# Altium PCB CT310高端控制盒核心板电路V1.3.PcbDoc (part 4 of 10)
Units mil, origin at the board's own origin, x right, y up, seen from the top; angles counter-clockwise.
Board outline 3735.76 x 4625 mil, 2 copper layers (TOP, BOTTOM), stack 10.4 mil thick; 198 components, 362 nets, 1085 pads, 352 vias.
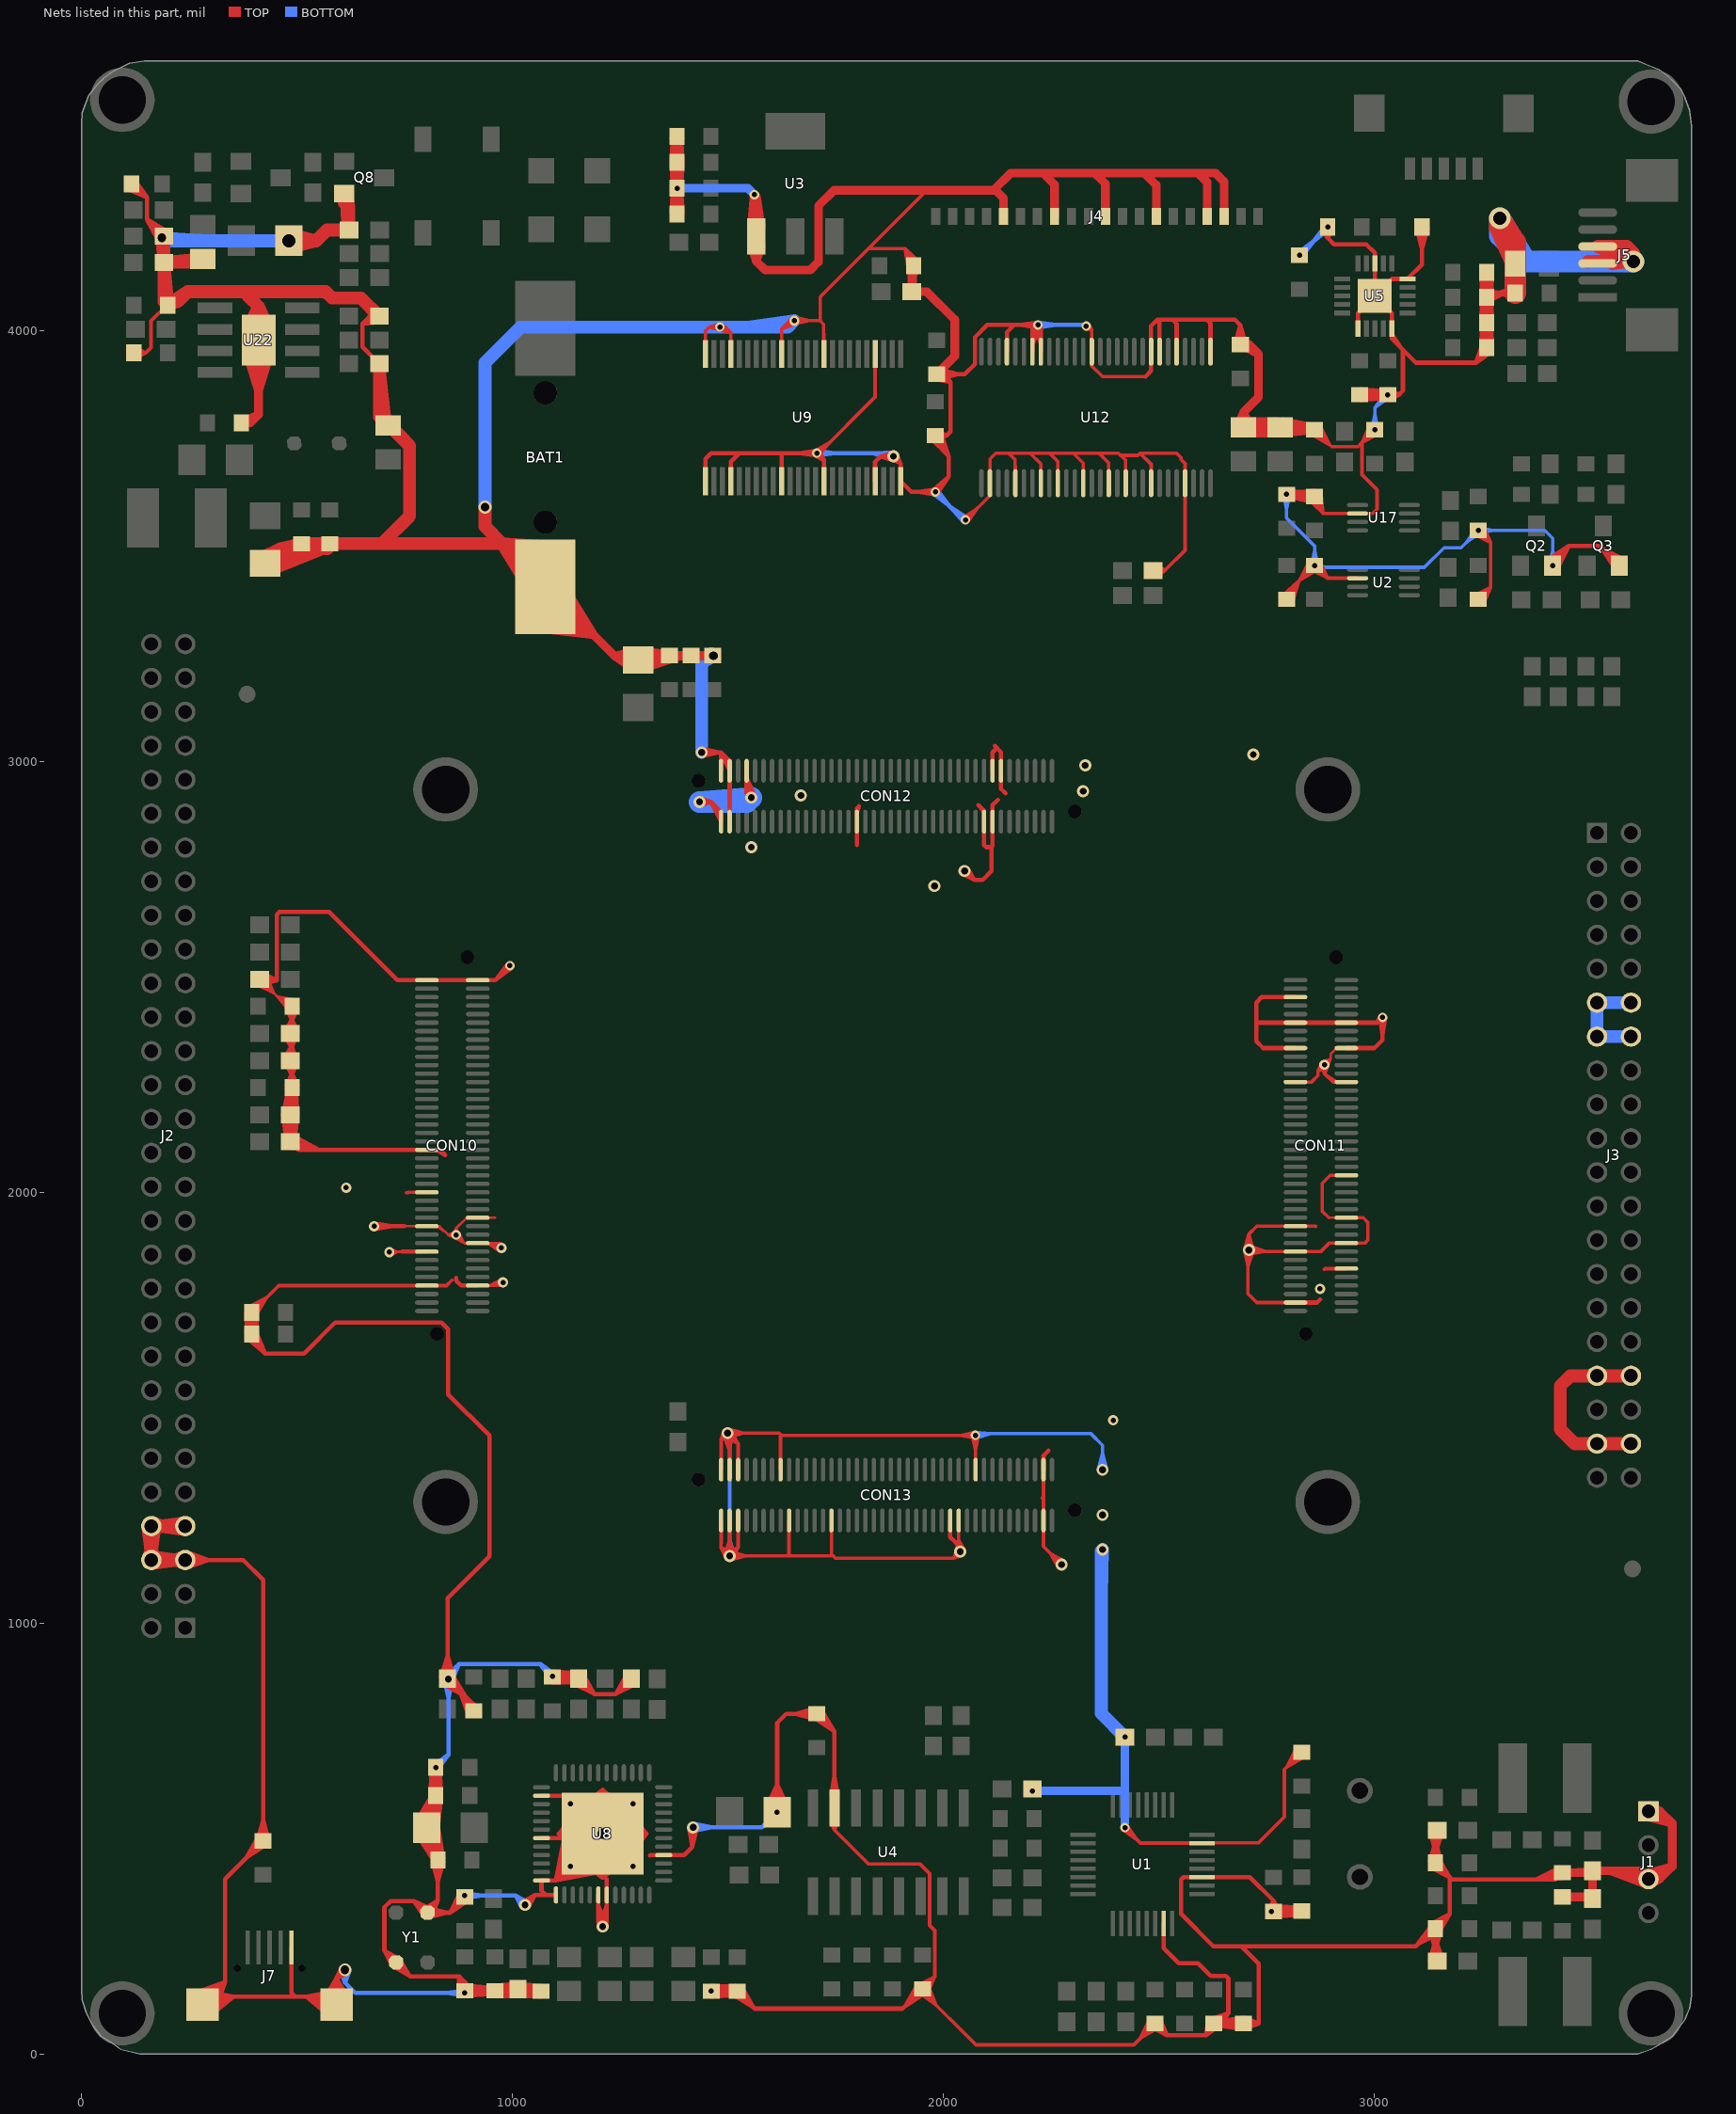
[diagram p4: the nets of this part, all layers, seen from the top]

## Via types
v1: diameter 22, hole 12, TOP to BOTTOM, tented both sides, 177 vias
v2: diameter 22, hole 12, TOP to BOTTOM, 89 vias
v3: diameter 28, hole 16, TOP to BOTTOM, 37 vias
v4: diameter 30, hole 20, TOP to BOTTOM, tented both sides, 26 vias
v5: diameter 24, hole 12, TOP to BOTTOM, 17 vias
v6: diameter 50, hole 30, TOP to BOTTOM, tented both sides, 5 vias
v7: diameter 40, hole 24, TOP to BOTTOM, 1 vias

## Nets (pads, with @x,y where several pads share a name; then routed paths per layer and width w, separated by ;. In a path a pad name is that pad's centre, name@x,y a point inside that pad or via, vN(x,y) a via of type N, cw(c..) or ccw(c..) an arc to the next point about the centre after c; other vN are vias at no path point) (continued)
GND: (continued)
  TOP w10: D3.2@108.78,4327.13 151.41,4308.97 ; D3.2@115.33,4338.03 151.41,4308.97 ; D3.2@123.69,4340 123.69,4336.69 151.41,4308.97 ; D3.2@124.59,4346.75 151.41,4308.97 ; J2.8@142.78,1225.38 150.53,1169.9 ; J2.8@142.84,1223.26 156.7,1170.84 ; J2.6@143.05,1149.35 161.39,1199.74 ; J2.8@143.05,1221.62 161.39,1171.24 ; J2.8@143.39,1220.08 166.08,1170.84 ; J2.8@143.98,1218.26 172.25,1169.9 ; J2.8@152.77,1224.92 156.7,1170.84 ; J2.6@152.8,1146.81 161.39,1199.74 ; J2.8@152.8,1224.16 161.39,1171.24 ; J2.8@152.83,1225.87 150.53,1169.9 ; J2.8@152.89,1223.43 166.08,1170.84 ; J2.8@153.09,1222.54 172.25,1169.9 ; J2.6@160.37,1137.56 216.35,1135.26 ; J2.6@160.37,1154.68 216.35,1156.98 ; J2.6@160.87,1127.5 216.35,1135.26 ; J2.6@160.87,1164.73 216.35,1156.98 ; J2.6@161.33,1137.5 215.4,1141.43 ; J2.6@161.33,1154.74 215.4,1150.81 ; J2.6@162.08,1137.52 215.01,1146.12 ; J2.6@162.08,1154.71 215.01,1146.12 ; J2.8@162.08,1216.26 215.01,1224.86 ; J2.8@162.08,1233.45 215.01,1224.86 ; J2.6@162.82,1137.61 215.4,1150.81 ; J2.6@162.82,1154.62 215.4,1141.43 ; J2.6@162.99,1127.56 215.4,1141.43 ; J2.6@162.99,1164.67 215.4,1150.81 ; J2.6@163.71,1137.81 216.35,1156.98 ; J2.6@163.71,1154.42 216.35,1135.26 ; J2.6@164.62,1127.78 215.01,1146.12 ; J2.6@164.62,1164.46 215.01,1146.12 ; J2.8@164.62,1206.52 215.01,1224.86 ; J2.8@164.62,1243.2 215.01,1224.86 ; J2.6@166.16,1128.12 215.4,1150.81 ; J2.6@166.16,1164.12 215.4,1141.43 ; J2.6@167.99,1128.7 216.35,1156.98 ; J2.6@167.99,1163.53 216.35,1135.26 ; J2.8@169.69,1222.54 150.53,1169.9 ; J2.8@169.89,1223.43 156.7,1170.84 ; J2.6@169.98,1146.81 161.39,1199.74 ; J2.8@169.98,1224.16 161.39,1171.24 ; J2.8@169.95,1225.87 172.25,1169.9 ; J2.8@170.01,1224.92 166.08,1170.84 ; R5.1@176.73,4210 151.41,4257.78 ; R5.1@177.39,4209.53 152.1,4257.37 ; R5.1@177.47,4209.41 153.21,4254.38 ; J2.8@178.8,1218.26 150.53,1169.9 ; J2.8@179.39,1220.08 156.7,1170.84 ; J2.6@179.73,1149.35 161.39,1199.74 ; J2.8@179.73,1221.62 161.39,1171.24 ; R5.1@179.85,4223.07 R5.1@197.83,4230.03 ; J2.8@179.94,1223.26 166.08,1170.84 ; J2.8@180,1225.38 172.25,1169.9 ; R5.1@188.65,4218.57 151.41,4257.78 ; R5.1@189.98,4219.22 151.41,4257.78 ; R5.1@192.81,4222.09 153.21,4254.38 ; R5.1@192.98,4221.92 152.1,4257.37 ; R5.1@194.91,4210.98 R5.1@197.83,4230.03 ; J2.7@233.53,1207.44 185.17,1235.72 ; J2.7@233.53,1242.27 185.17,1214 ; J2.7@235.36,1206.86 186.12,1229.55 ; J2.7@235.36,1242.86 186.12,1220.17 ; J2.5@236.9,1127.78 186.51,1146.12 ; J2.5@236.9,1164.46 186.51,1146.12 ; J2.7@236.9,1206.52 186.51,1224.86 ; J2.7@236.9,1243.2 186.51,1224.86 ; J2.7@237.81,1216.55 185.17,1235.72 ; J2.7@237.81,1233.16 185.17,1214 ; J2.7@238.53,1206.3 186.12,1220.17 ; J2.7@238.53,1243.41 186.12,1229.55 ; J2.7@238.7,1216.35 186.12,1229.55 ; J2.7@238.7,1233.36 186.12,1220.17 ; J2.5@239.44,1137.52 186.51,1146.12 ; J2.5@239.44,1154.71 186.51,1146.12 ; J2.7@239.44,1216.26 186.51,1224.86 ; J2.7@239.44,1233.45 186.51,1224.86 ; J2.7@240.19,1216.24 186.12,1220.17 ; J2.7@240.19,1233.48 186.12,1229.55 ; J2.7@240.65,1206.24 185.17,1214 ; J2.7@240.65,1243.47 185.17,1235.72 ; J2.5@240.82,1137.52 293.75,1146.12 ; J2.5@240.82,1154.71 293.75,1146.12 ; J2.7@241.15,1216.3 185.17,1214 ; J2.7@241.15,1233.42 185.17,1235.72 ; J2.5@243.36,1127.78 293.75,1146.12 ; J2.5@243.36,1164.46 293.75,1146.12 ; J7.7@262.93,141.83 332.39,166.6 ; J7.7@267,132.51 332.39,166.6 ; J7.7@272.25,123.92 332.39,166.6 ; J7.7@278.06,136.74 352.97,132.83 ; J7.7@278.21,126.68 352.97,132.83 ; J7.7@279.28,146.84 352.97,132.83 ; J7.7@284.27,102.72 352.97,132.83 ; J7.7@288.92,93.79 352.97,132.83 ; J7.7@289.72,106.45 332.39,166.6 ; J7.7@294.79,85.49 352.97,132.83 ; J7.7@298.31,101.2 332.39,166.6 ; J7.7@307.63,97.13 332.39,166.6 ; C112.2@384.89,1659.99 425.76,1625 ; C112.2@394.24,1668.6 425.76,1625 ; C112.2@394.24,1670.57 394.24,1656.52 425.76,1625 ; C112.2@405.36,1674.78 425.76,1625 ; C89.1@408.16,496.06 420.76,542.09 C89.1@433.36,496.06 ; C89.1@408.6,501.97 381.83,455.44 ; R174.1@413.18,2494.14 415.69,2491.63 452.39,2491.63 ; R174.1@415.15,2494.14 452.39,2491.63 ; R174.1@417.06,2479.58 452.39,2491.63 ; C89.1@418.79,494.37 381.83,455.44 ; R174.1@419,2508.31 452.39,2491.63 ; C89.1@426.91,484.58 381.83,455.44 ; R129.1@467.4,2180.03 R128.1@472.95,2129.94 ; R129.1@467.41,2180.25 C88.2@477.26,2229.15 ; R128.1@469.52,2118.74 484.05,2166.26 R128.1@498.57,2118.74 ; R129.1@469.52,2177.33 484.05,2129.81 R129.1@498.57,2177.33 ; R129.1@469.52,2181.67 484.05,2229.18 R129.1@498.57,2181.67 ; R129.1@471.54,2181.97 C88.2@487.06,2229.18 ; R129.1@472.12,2174.76 R128.1@495.15,2129.94 ; R129.1@472.32,2184.79 C88.2@497.2,2228.87 ; C88.2@475.28,2239.82 R129.1@484.05,2192.51 ; R128.1@483.52,2102.1 550.1,2098.06 ; C88.2@484.05,2238.49 R129.1@484.05,2179.5 R128.1@484.05,2116.57 502.56,2098.06 CON10.39@800.66,2098.06 831.13,2098.06 ; R128.1@486.02,2116.57 550.1,2098.06 ; 486.94,177.28 J7.5@486.94,212.2 ; J7.5@486.94,246.65 486.94,141.65 495.76,132.83 ; C88.2@487.98,2240.46 R129.1@484.05,2192.51 ; R128.1@491.62,2130.14 550.1,2098.06 ; R129.1@495.98,2174.76 R128.1@472.95,2129.94 ; R129.1@496.33,2183.05 C88.2@477.26,2229.15 ; C88.2@500.41,2237.75 R129.1@484.05,2192.51 ; R129.1@500.58,2181.36 C88.2@487.06,2229.18 ; R129.1@500.66,2178.37 C88.2@497.2,2228.87 ; R129.1@500.69,2180.03 R128.1@495.15,2129.94 ; J7.6@560.03,123.05 591.27,175.51 ; J7.6@569.25,118.56 591.27,175.51 ; J7.6@576.32,85.7 520.82,132.83 ; J7.6@578.93,115.71 591.27,175.51 ; J7.6@582.35,93.9 520.82,132.83 ; J7.6@587.13,102.76 520.82,132.83 ; J7.6@592.27,146.83 520.82,132.83 ; J7.6@593.37,126.67 520.82,132.83 ; J7.6@593.53,136.74 520.82,132.83 ; v4@602.52,200.67 591.27,175.51 ; J7.6@603.61,115.71 591.27,175.51 ; v4(610.76,195) 591.27,175.51 ; J7.6@613.29,118.56 591.27,175.51 ; v4@616.43,186.76 591.27,175.51 ; J7.6@622.51,123.05 591.27,175.51 ; v5@679.15,1927.55 720.62,1920.88 ; v5@679.25,1913.6 720.62,1920.88 ; R135.2@680.21,4044.87 651.41,4015.65 ; R135.2@690.04,4032.85 668.61,4032.85 ; R133.2@690.62,3922.85 690.14,3922.85 651.41,3961.59 651.41,4015.65 ; R135.2@692.33,4018.64 651.41,4015.65 ; Y1.4@719.83,205.43 702.16,239.38 ; Y1.4@722.1,203.1 761.54,180 ; Y1.4@736.11,221.71 702.16,239.38 ; Y1.4@738.44,219.44 761.54,180 ; 743.16,2098.06 CON10.39@778.16,2098.06 ; 743.16,2491.75 CON10.79@778.16,2491.75 ; 748.92,1920.88 678.92,1920.88 v5(678.61,1920.57) 720.62,1920.88 ; C27.2@775.54,537.43 C26.2@809.02,595.06 ; C27.2@776.1,511.07 C31.2@813.79,453.68 ; C27.2@777.1,541.09 C26.2@821.39,598.03 ; C27.2@777.96,507.36 C31.2@826.39,452.84 ; C27.2@777.94,507.4 C31.2@826.39,452.57 ; C27.2@778.17,542.97 C26.2@826.39,595.2 ; CON10.15@778.16,1861.83 743.61,1861.83 CON10.15@800.66,1861.83 ; C27.2@779.61,545.05 C26.2@833.43,593.49 ; C27.2@780.73,503.58 C31.2@837.52,458.99 ; C27.2@784.66,533.02 C26.2@809.02,595.06 ; C27.2@784.95,515.98 C31.2@813.79,453.68 ; C27.2@785.49,535.46 C26.2@821.39,598.03 ; C27.2@786.06,536.66 C26.2@826.39,595.2 ; C27.2@786.88,538.03 C26.2@833.43,593.49 ; C27.2@787.52,511.07 C31.2@837.52,458.99 ; Y1.2@793.58,319.95 770.5,354.74 ; C27.2@794.24,530.07 C26.2@809.02,595.06 ; C27.2@794.33,519.52 C31.2@813.79,453.68 ; C27.2@794.51,531.08 C26.2@821.39,598.03 ; Y1.2@794.63,336.45 826.39,356.5 ; C27.2@794.7,531.56 C26.2@826.39,595.2 ; C27.2@794.99,532.14 C26.2@833.43,593.49 ; C27.2@795.21,517.5 C31.2@837.52,458.99 ; C27.2@800.64,525 C27.2@826.39,499.25 ; Y1.2@803.75,316.12 848.97,327.68 Y1.2@803.75,339.24 ; C27.2@806.37,524.13 C31.2@837.52,458.99 ; C27.2@806.56,526.26 C26.2@833.43,593.49 ; C27.2@806.8,526.86 C26.2@826.39,595.2 ; C27.2@806.94,527.35 C26.2@821.39,598.03 ; C27.2@807.07,522 C31.2@813.79,453.68 ; C27.2@807.12,528.44 C26.2@809.02,595.06 ; Y1.2@808.54,337.52 770.5,354.74 ; C26.2@808.7,601.2 C32.2@811.97,652.37 ; C26.2@808.82,603.9 C32.2@822.58,651.56 ; C26.2@809.03,604.94 C32.2@826.39,649.97 ; C26.2@809.45,606.34 C32.2@831.96,649.34 ; Y1.2@812.29,321.69 826.39,356.5 ; C31.2@813.79,446.34 826.39,400.31 ; C32.2@815.42,665.59 814.14,622.32 ; C32.2@815.42,665.64 C26.2@813.03,615.33 ; C32.2@815.48,663.98 825.41,624.14 ; C32.2@815.49,663.88 826.39,622.44 ; C32.2@815.51,666.18 810.17,624.19 ; C32.2@815.55,663.62 C26.2@831.11,611.02 ; C32.2@815.59,663.47 829.06,624.27 ; C32.2@815.65,663.26 830.5,624.61 ; C27.2@815.69,527.81 C31.2@837.52,458.99 ; C27.2@816.11,523.19 C26.2@833.43,593.49 ; C27.2@816.61,524.79 C26.2@826.39,595.2 ; C27.2@816.88,526.03 C26.2@821.39,598.03 ; C27.2@817.09,522.25 C31.2@813.79,453.68 ; C27.2@817.14,528.9 C26.2@809.02,595.06 ; C32.2@817.97,669.93 C32.2@809.02,660.08 ; C32.2@821.39,663.03 C26.2@826.39,614.7 ; C32.2@821.71,659.01 C32.2@834.1,662.67 ; C32.2@822.29,659.07 C32.2@809.02,660.08 ; CON10.79@823.16,2491.75 858.16,2491.75 ; C32.2@823.81,670.49 C32.2@834.1,662.67 ; C27.2@825.52,530.19 C31.2@837.52,458.99 ; C27.2@826.06,521.46 C26.2@833.43,593.49 ; C31.2@826.39,448.03 826.39,400.31 ; C31.2@826.39,451.97 C27.2@826.39,499.25 ; C27.2@826.39,525 826.39,660 v1(821.39,665) ; C27.2@826.69,524.11 C26.2@826.39,595.2 ; C27.2@826.99,526.11 C26.2@821.39,598.03 ; C27.2@827.07,530.9 C26.2@809.02,595.06 ; C32.2@827.05,663 810.17,624.19 ; C27.2@827.14,521.02 C31.2@813.79,453.68 ; C32.2@827.22,663.59 814.14,622.32 ; C32.2@827.24,663.65 C26.2@813.03,615.33 ; C32.2@827.32,665.89 830.5,624.61 ; C32.2@827.38,665.28 826.39,622.44 ; C32.2@827.35,665.68 829.06,624.27 ; C32.2@827.34,665.74 C26.2@831.11,611.02 ; C32.2@827.39,665.15 825.41,624.14 ; C26.2@833.5,605.84 C32.2@811.97,652.37 ; C26.2@834.06,600.85 C32.2@831.96,649.34 ; C26.2@834.04,603.3 C32.2@822.58,651.56 ; C26.2@834.1,597.67 C27.2@826.39,549.97 ; C26.2@834.1,602.33 C32.2@826.39,649.97 ; C31.2@838.99,446.34 826.39,400.31 ; C31.2@838.99,453.68 C27.2@826.39,499.25 ; R44.1@839.96,857.17 889.51,830.11 ; R44.1@841.77,870.4 848.61,922.66 ; R44.1@841.78,870.65 849.78,918.84 ; R44.1@844.76,863.29 887.23,831.35 ; R44.1@844.87,863.2 885.15,834.26 ; R44.1@844.89,863.18 885.27,834.35 ; R44.1@844.98,863.1 887.54,833.33 ; R44.1@845.98,862.38 R44.1@834.09,875.14 ; R44.1@848.61,869.04 889.51,830.11 ; R44.1@848.61,872.97 848.61,922.66 ; R44.1@851.11,878.99 R44.1@834.09,875.14 ; R44.1@857.64,875.8 887.54,833.33 ; R44.1@857.81,875.6 887.23,831.35 ; R44.1@859.7,871.01 849.78,918.84 ; R44.1@859.69,871.13 848.61,922.66 ; R44.1@860.04,878.27 889.51,830.11 ; 861.27,2491.75 CON10.80@896.27,2491.75 ; R44.1@863.14,875.14 848.61,922.66 ; 868.61,1800.57 868.61,1794.76 880.27,1783.1 ; C37.2@883.75,370.66 857.93,329.76 ; C37.2@883.76,370.68 859.77,332.59 ; C37.2@883.8,370.72 859.74,333.32 ; C37.2@883.9,370.86 856.8,331.69 ; C37.2@884.03,363.27 C37.2@895.08,354.86 ; C36.2@884.93,145.93 C36.2@897.86,152.2 ; C37.2@885.47,362.04 C37.2@876.03,371.37 ; C36.2@886.13,135.74 C36.2@874.04,144.53 ; C36.2@886.65,146.2 875.76,180 ; C37.2@886.65,364.37 854.85,327.68 ; C36.2@887.39,147.07 929.3,152.77 ; C36.2@887.66,147.12 931.93,151.23 ; C36.2@888.5,135.2 931.74,137.35 ; C37.2@888.61,361.44 854.85,327.68 ; C36.2@888.78,135.2 930.69,139.39 ; C36.2@888.75,147.2 C36.2@874.04,144.53 ; C37.2@889.19,373.12 C37.2@876.03,371.37 ; C36.2@889.3,147.16 930.69,139.39 ; C36.2@889.56,147.13 931.74,137.35 ; C36.2@890.1,133.49 938.84,138.01 ; C36.2@890.1,158.91 938.84,154.39 ; C36.2@890.36,135.46 931.93,151.23 ; C36.2@890.66,135.56 929.3,152.77 ; C37.2@892.82,362.87 856.8,331.69 ; C37.2@892.9,362.95 859.74,333.32 ; C37.2@892.95,363 859.77,332.59 ; C37.2@893.01,363.06 857.93,329.76 ; C36.2@893.91,138.39 C36.2@897.86,152.2 ; C36.2@894.32,134.05 938.84,154.39 ; C36.2@894.32,158.36 938.84,138.01 ; C37.2@894.4,368.73 C37.2@895.08,354.86 ; C33.2@896.19,790.47 877,842.62 ; CON10.8@896.27,1783.1 880.27,1783.1 ; C33.2@905.76,796.2 905.76,813.86 R44.1@848.61,871 848.61,1057.85 945.76,1155 945.76,1435 850.29,1530.47 850.29,1681.65 835.06,1696.88 587.64,1696.88 515.76,1625 425.76,1625 ; C33.2@907.54,796.2 877,842.62 ; C33.2@917.29,804.36 877,842.62 ; CON10.8@918.77,1783.1 880.27,1783.1 ; CON10.80@941.27,2491.75 959.79,2491.75 ; C29.1@954.95,133.6 908.93,146.2 ; C29.1@954.95,158.8 908.93,146.2 ; C29.1@956.65,146.2 908.93,146.2 ; C29.1@958.15,158.68 R33.2@1006.89,161.71 ; C29.1@959.12,133.57 R33.2@1007.48,134.39 ; C29.1@961.8,158.86 R33.2@1008.28,148.02 ; C29.1@962.28,133.6 R33.2@1008.25,146.2 ; C29.1@962.28,158.8 R33.2@1008.25,146.2 ; C29.1@962.75,133.67 R33.2@1008.28,148.02 ; C29.1@965.28,158.02 R33.2@1007.48,134.39 ; C29.1@966.16,134.77 R33.2@1006.89,161.71 ; v2@989.1,2529.53 961.4,2493.36 v2@997.57,2521.06 ; v2(993.61,2525.57) 959.79,2491.75 ; R33.2@1009.46,162.6 C29.1@962.31,146.2 ; R33.2@1010.6,133.57 C29.1@962.31,146.2 ; R33.2@1012.19,146.2 1065.19,146.2 C38.2@1065.76,145.63 ; R33.2@1012.19,150.14 R33.2@1008.25,146.2 ; R33.2@1013.77,133.57 C38.2@1062.03,146.2 ; R33.2@1014.92,162.6 C38.2@1062.03,146.2 ; v3@1023.18,352.75 1051.88,368.84 ; v3(1028.61,345.57) 1051.88,368.84 ; v3@1035.79,340.14 1051.88,368.84 ; C38.2@1058.09,134.26 R33.2@1017.6,161.67 ; C38.2@1059.23,157.5 R33.2@1016.79,134.36 ; C38.2@1061.47,133.13 R33.2@1016.11,148.01 ; C38.2@1061.95,133.05 R33.2@1016.07,146.2 ; C38.2@1062.25,158.25 R33.2@1016.07,146.2 ; C38.2@1062.73,158.3 R33.2@1016.11,148.01 ; C38.2@1065.1,132.98 R33.2@1016.79,134.36 ; C38.2@1066.36,158.08 R33.2@1017.6,161.67 ; U8.43@1066.88,500.73 1198.77,500.73 v2(1133.61,435.57) ; U8.38@1066.88,599.15 U8.49@1120.03,599.15 ; U8.48@1081.88,402.3 1100.35,402.3 ; U8.43@1081.88,500.73 U8.49@1116.88,500.73 ; U8.38@1081.88,599.15 U8.49@1116.88,599.15 ; C35.1@1086.34,875.09 C35.1@1092.33,862.36 ; C35.1@1086.57,878.53 C35.1@1093.18,887.62 ; C35.1@1086.75,873.9 C35.1@1095.45,862.29 ; C35.1@1086.82,873.75 C35.1@1095.85,862.34 ; C35.1@1087.16,879.7 C35.1@1095.85,887.54 ; C35.1@1087.27,879.86 C35.1@1096.25,887.48 ; C35.1@1087.36,872.86 C35.1@1098.4,862.95 ; C35.1@1090.57,870.65 1133.15,861.81 ; C35.1@1090.86,870.58 1131.9,864.33 ; C35.1@1090.89,870.57 R45.2@1139.16,862.95 ; C35.1@1090.94,870.56 1132.28,864.82 ; C35.1@1092.24,870.43 1133.14,873.76 ; C35.1@1093.59,870.59 1132.94,883.15 ; C35.1@1094.19,882.08 R45.2@1139.16,862.95 ; C35.1@1094.26,882.06 1132.28,864.82 ; C35.1@1094.34,882.03 1131.9,864.33 ; C35.1@1094.59,881.93 1133.15,861.81 ; C35.1@1098.03,877.79 C35.1@1098.4,862.95 ; C35.1@1098.06,875.21 C35.1@1092.33,862.36 ; C35.1@1098.09,877.51 C35.1@1093.18,887.62 ; C35.1@1098.16,875.86 C35.1@1096.25,887.48 ; C35.1@1098.18,876.07 C35.1@1095.85,887.54 ; C35.1@1098.18,876.71 C35.1@1095.85,862.34 ; C35.1@1098.19,876.54 C35.1@1095.45,862.29 ; C35.1@1099.16,886.63 R45.2@1141.26,861.7 ; U8.1@1100.35,368.84 1076.88,368.84 ; U8.49@1127.79,437.01 U8.49@1144.4,491.81 ; U8.49@1127.96,437.57 U8.49@1147.51,484.04 ; U8.49@1128.23,438.21 U8.49@1151.38,478.66 ; U8.49@1128.35,577.69 U8.49@1120.03,599.15 ; U8.49@1128.61,438.88 U8.49@1155.82,474.57 ; U8.49@1129.08,552.7 1100.35,402.3 ; U8.49@1130.02,575.76 U8.49@1168.17,551.01 ; U8.49@1130.31,440.58 U8.49@1169.11,462.62 ; U8.49@1131,440.97 U8.49@1172.61,457.78 ; U8.49@1131.69,441.25 U8.49@1176.7,453.34 ; U8.49@1132.31,441.43 U8.49@1182.08,449.47 ; U8.49@1132.79,441.51 U8.49@1189.86,446.36 ; U8.49@1135.05,429.75 U8.49@1189.86,446.36 ; U8.49@1135.61,429.91 U8.49@1182.08,449.47 ; U8.49@1136.25,430.18 U8.49@1176.7,453.34 ; U8.49@1136.92,430.57 U8.49@1172.61,457.78 ; U8.49@1137.81,584.86 U8.49@1168.17,551.01 ; U8.49@1137.96,584.71 U8.49@1120.03,599.15 ; U8.49@1138.62,432.26 U8.49@1160.67,471.07 ; U8.49@1139.01,432.96 U8.49@1155.82,474.57 ; U8.49@1139.23,550.4 1100.35,402.3 ; U8.49@1139.3,433.65 U8.49@1151.38,478.66 ; U8.49@1139.47,434.26 U8.49@1147.51,484.04 ; U8.49@1139.56,434.75 U8.49@1144.4,491.81 ; R45.2@1144.68,856.99 1189.08,835 ; U8.49@1149.11,547.44 1100.35,402.3 ; R45.2@1150.35,858.54 C35.1@1103.17,874.94 ; R45.2@1151.5,887.57 C35.1@1103.17,874.94 ; R45.2@1153.08,869.04 1189.08,835 ; R45.2@1153.08,872.97 C35.1@1103.17,874.94 ; U8.49@1158.7,543.86 1100.35,402.3 ; R45.2@1164.64,878.09 1189.08,835 ; U8.49@1167.96,539.68 1100.35,402.3 ; U8.49@1176.88,534.92 1100.35,402.3 ; U8.49@1185.42,529.6 1100.35,402.3 ; U8.49@1193.58,523.76 1100.35,402.3 ; U8.49@1195.39,517.64 U8.49@1171.39,456.83 ; U8.49@1195.9,518.53 U8.49@1170.58,463.91 ; U8.49@1196.73,501.42 U8.49@1167.4,551.78 ; U8.49@1197.76,520.93 U8.49@1161.95,472.53 ; U8.49@1198.71,521.84 U8.49@1154.88,473.34 ; 1198.77,318.84 U8.6@1198.77,353.84 ; U8.6@1198.77,368.84 1198.77,305.41 v3(1208.61,295.57) ; v3@1199.67,294.6 1198.77,344.4 ; v3@1199.99,298.14 1218.46,344.4 ; U8.49@1201.32,517.41 1100.35,402.3 ; U8.49@1203.85,524.8 U8.49@1155.56,500.73 ; U8.49@1209.27,495.59 U8.49@1155.56,500.73 ; U8.49@1215.45,503.27 1100.35,402.3 ; U8.49@1215.69,497.34 U8.49@1154.88,473.34 ; U8.49@1216.57,497.85 U8.49@1161.95,472.53 ; v3@1217.24,298.14 1198.77,344.4 ; v3@1217.56,294.6 1218.46,344.4 ; U8.49@1217.77,522.45 U8.49@1167.4,551.78 ; 1218.46,318.84 U8.7@1218.46,353.84 ; U8.7@1218.46,383.84 1218.46,405.41 U8.7@1218.46,368.84 1218.46,305.41 v3(1208.61,295.57) ; U8.49@1218.97,499.72 U8.49@1170.58,463.91 ; U8.49@1219.88,500.67 U8.49@1171.39,456.83 ; U8.49@1221.8,495.54 1100.35,402.3 ; U8.49@1227.65,487.38 1100.35,402.3 ; U8.49@1232.96,478.83 1100.35,402.3 ; U8.49@1237.72,469.92 1100.35,402.3 ; U8.49@1241.91,460.65 1100.35,402.3 ; U8.49@1245.49,451.07 1100.35,402.3 ; U8.49@1248.44,441.19 1100.35,402.3 ; U8.49@1250.74,431.04 1100.35,402.3 ; R42.1@1263.31,878.09 1238.86,835 ; R42.1@1274.87,869.04 1238.86,835 ; R42.1@1274.87,871 1238.86,835 ; R42.1@1283.26,856.99 1238.86,835 ; 1318.61,460.57 1319.4,461.36 ; U8.16@1335.35,461.36 1319.4,461.36 ; U8.16@1365.35,461.36 1398.48,461.36 ; C41.1@1368.73,4270.82 C44.1@1370.73,4319.24 ; C42.1@1368.73,4389.18 C44.1@1370.73,4340.76 ; C42.1@1368.73,4390.82 C43.1@1370.73,4439.24 ; C43.1@1368.79,4446.34 C42.1@1381.39,4400.31 ; C41.1@1369.46,4276.37 C44.1@1392.05,4319.24 ; C42.1@1369.46,4383.63 C44.1@1392.05,4340.76 ; C42.1@1369.46,4396.37 C43.1@1392.05,4439.24 ; C44.1@1375.46,4329.07 C42.1@1370.2,4382.23 ; C44.1@1375.46,4330.93 C41.1@1370.2,4277.77 ; C44.1@1375.53,4328.73 C42.1@1369.48,4370.89 ; C44.1@1375.53,4331.27 C41.1@1369.48,4289.11 ; C44.1@1375.76,4327.92 C41.1@1393.3,4289.11 ; C44.1@1375.76,4332.08 C42.1@1393.3,4370.89 ; C44.1@1378.44,4324.77 C44.1@1368.79,4333.66 ; C44.1@1378.44,4335.23 C44.1@1368.79,4326.34 ; C44.1@1381.08,4324.01 C44.1@1393.99,4326.34 ; C44.1@1381.08,4335.99 C44.1@1393.99,4333.66 ; C41.1@1381.39,4270 v1(1381.39,4330) ; C44.1@1381.39,4328.03 C41.1@1381.39,4280.31 ; C44.1@1381.39,4331.97 C42.1@1381.39,4379.69 ; C43.1@1381.39,4448.03 C42.1@1381.39,4400.31 ; C43.1@1381.39,4450 C42.1@1381.39,4390 v1(1381.39,4330) ; C44.1@1381.7,4324.01 C44.1@1368.79,4326.34 ; C44.1@1381.7,4335.99 C44.1@1368.79,4333.66 ; C44.1@1384.34,4324.77 C44.1@1393.99,4333.66 ; C44.1@1384.34,4335.23 C44.1@1393.99,4326.34 ; C44.1@1387.02,4327.92 C41.1@1369.48,4289.11 ; C44.1@1387.02,4332.08 C42.1@1369.48,4370.89 ; C44.1@1387.25,4328.73 C42.1@1393.3,4370.89 ; C44.1@1387.25,4331.27 C41.1@1393.3,4289.11 ; C44.1@1387.32,4329.07 C42.1@1392.58,4382.23 ; C44.1@1387.32,4330.93 C41.1@1392.58,4277.77 ; C41.1@1393.32,4276.37 C44.1@1370.73,4319.24 ; C42.1@1393.32,4383.63 C44.1@1370.73,4340.76 ; C42.1@1393.32,4396.37 C43.1@1370.73,4439.24 ; C43.1@1393.99,4446.34 C42.1@1381.39,4400.31 ; C41.1@1394.05,4270.82 C44.1@1392.05,4319.24 ; C42.1@1394.05,4389.18 C44.1@1392.05,4340.76 ; C42.1@1394.05,4390.82 C43.1@1392.05,4439.24 ; v3@1409.63,524.96 1417.12,481.53 ; v3@1427.53,524.35 1417.12,481.53 ; v3(1433.61,2905.57) 1460.52,2905.57 ; v3@1435.12,2896.7 1460.52,2905.57 ; v3@1435.12,2914.44 1460.52,2905.57 ; v3(1438.61,3020.57) 1478.61,3020.57 ; v3@1439.63,3011.63 1478.61,3020.57 ; v3@1439.63,3029.51 1478.61,3020.57 ; U9.25@1447.23,3650 1447.23,3701.47 ; U9.25@1447.23,3676.5 1447.23,3701.47 ; C28.1@1455.03,143.84 C28.1@1461.58,132.97 ; C28.1@1455.03,147.42 C28.1@1461.58,158.29 ; C28.1@1456.23,141.7 C28.1@1467.13,133.7 ; C28.1@1456.23,149.56 C28.1@1467.13,157.56 ; C28.1@1459.93,139.69 C39.2@1501.11,136.98 ; C28.1@1459.93,151.57 C39.2@1501.11,154.28 ; C28.1@1459.97,139.68 C39.2@1502.47,137.03 ; C28.1@1459.97,151.58 C39.2@1502.47,154.23 ; C28.1@1462.44,139.87 C39.2@1501.11,154.28 ; C28.1@1462.44,151.39 C39.2@1501.11,136.98 ; C28.1@1466.55,144.05 C28.1@1467.13,157.56 ; C28.1@1466.55,147.21 C28.1@1467.13,133.7 ; C28.1@1466.67,144.59 C28.1@1461.58,132.97 ; C28.1@1466.67,146.67 C28.1@1461.58,158.29 ; CON12.80@1483.73,2977.98 1483.73,3015.45 ; CON12.80@1483.73,3000.48 1483.73,3015.45 ; CON12.77@1503.42,2859.86 CON12.78@1503.42,2977.98 ; CON12.77@1503.42,2882.36 1503.42,2917.36 ; 1503.42,2920.48 CON12.78@1503.42,2955.48 ; U9.28@1506.29,3650 1506.29,3695.53 ; U9.28@1506.29,3676.5 1506.29,3695.53 ; C39.2@1514.61,135.84 1559.69,106.7 ; C39.2@1517.1,133.03 C28.1@1471.07,145.63 ; C39.2@1517.1,158.23 C28.1@1471.07,145.63 ; C39.2@1518.79,145.63 C28.1@1471.07,145.63 ; C39.2@1522.73,145.63 1559.69,106.7 ; C39.2@1532.92,153.23 1559.69,106.7 ; CON12.74@1542.79,2977.98 1542.79,2926.39 ; v3@1544.72,2914.17 CON12.74@1542.79,2955.48 ; v3@1544.7,2914.36 CON12.74@1542.79,2961.9 ; v3@1561.99,2918.86 CON12.74@1542.79,2955.48 ; v3@1562.14,2918.44 CON12.74@1542.79,2961.9 ; C34.2@1587.86,570.22 1613.73,626 ; C34.2@1597.39,566.72 1613.73,626 ; C34.2@1607.25,564.85 1613.73,626 ; C34.2@1607.73,560.66 1611.39,603.97 ; C34.2@1607.78,561.31 1616.07,603.97 ; C34.2@1613.73,564.51 1613.73,626 ; C34.2@1619.73,560.66 1616.07,603.97 ; C34.2@1619.69,561.31 1611.39,603.97 ; C34.2@1620.22,564.85 1613.73,626 ; U9.34@1624.4,3650 1624.4,3711.35 ; U9.34@1624.4,3676.5 1624.4,3711.35 ; C34.2@1630.08,566.72 1613.73,626 ; C34.2@1639.61,570.22 1613.73,626 ; C11.2@1699.61,779.58 1744.69,750.44 ; v1@1702.08,3710.26 1722.82,3697.94 ; C11.2@1702.1,776.77 1656.07,789.37 ; C11.2@1702.1,801.97 1656.07,789.37 ; C11.2@1703.79,789.37 1656.07,789.37 ; v1@1705.32,3709.02 1664.76,3715 v1@1705.32,3720.98 ; C11.2@1707.73,789.37 1744.69,750.44 ; v1@1710.5,3718.68 1722.82,3697.94 ; C11.2@1717.92,796.97 1744.69,750.44 ; U9.39@1722.82,3650 1722.82,3697.94 ; U9.39@1722.82,3676.5 1722.82,3697.94 ; U4.15@1739.93,602.72 1746.72,643.98 ; U4.15@1746.72,570.67 1746.72,748.41 C11.2@1705.76,789.37 1635.13,789.37 1613.73,767.97 v1(1613.73,560.57) ; U4.15@1746.72,602.17 1746.72,643.98 ; U4.15@1753.51,602.72 1746.72,643.98 ; 1798.61,2805.57 1798.69,2805.65 ; CON12.47@1798.69,2837.36 1798.69,2805.65 ; U9.45@1840.93,3650 1840.93,3695.17 ; U9.45@1840.93,3676.5 1840.93,3695.17 ; v3@1878.61,3700.16 1900,3691.26 ; v3@1882.27,3698.74 1853.4,3707.64 ; v3@1882.27,3716.54 1853.4,3707.64 ; v3@1891.09,3712.65 1900,3691.26 ; U9.48@1900,3676.5 1900,3691.26 ; C13.2@1938.6,158.23 1911.83,111.7 ; C13.2@1948.79,150.63 1911.83,111.7 ; C13.2@1950.76,150.63 1905.13,105 1561.39,105 C39.2@1520.76,145.63 v1(1460.76,145.63) ; C13.2@1956.91,140.84 1911.83,111.7 ; C58.2@1972.72,3747.78 2010.34,3710.11 ; v1@1976.53,3629.26 2010.43,3658.67 ; v1@1978.76,3627 2011.76,3660 2011.76,3708.7 1980.76,3739.7 C58.2@1980.76,3755.63 2006.39,3755.63 ; v1@1980.32,3619.02 1939.76,3625 ; v1@1980.32,3630.98 1939.76,3625 ; C30.2@1981.06,3886.38 2015.76,3880 ; C30.2@1983.61,3898.27 C30.2@1997.49,3898.27 ; v1@1985.52,3621.34 2010.43,3658.67 ; C58.2@1986.15,3743.38 2006.39,3755.63 ; C58.2@1986.15,3767.88 2006.39,3755.63 ; C30.2@1987.28,3885.67 2033.3,3898.27 ; C30.2@1987.28,3910.88 2033.3,3898.27 ; C30.2@1994.02,3907.78 2015.76,3880 ; C58.2@1994.31,3760.88 2010.34,3710.11 ; CON13.25@2015.23,1215.31 2015.23,1199.31 ; CON13.25@2015.23,1237.81 2015.23,1199.31 ; 2028.61,1185.57 2028.61,1185.93 2015.23,1199.31 ; v3@2043.54,2738.14 2070.76,2725 ; v3@2055.65,2751.18 2070.76,2725 ; CON12.17@2093.97,2837.36 2093.97,2805.21 ; CON12.17@2093.97,2882.36 2080.91,2898.36 2093.97,2885.29 CON12.17@2093.97,2859.86 2093.97,2805.21 ; CON12.15@2113.65,2837.36 2113.65,2803.46 ; CON12.15@2113.65,2882.36 2113.65,2898.36 ; CON12.16@2113.65,2977.98 2113.65,3020.61 ; CON12.16@2113.65,3000.48 2113.65,3020.61 ; 2118.61,3025.57 2113.65,3020.61 ; 2118.61,3035.57 2133.34,3020.85 ; 2125.86,2910.57 2113.65,2898.36 ; CON12.14@2133.34,2955.48 2133.34,2935.85 ; CON12.14@2133.34,3000.48 2133.34,3020.85 ; 2143.61,2925.57 2133.34,2935.85 ; U12.53@2146.92,3950.52 2146.92,3995.95 ; U12.53@2146.92,3977.68 2146.92,3995.95 ; U12.50@2205.98,3950.52 2205.98,4007.43 ; v1@2212.77,4011.3 U12.49@2225.66,3968.58 ; v1@2212.74,4013.89 U12.50@2205.98,3967.5 ; v1@2212.83,4014.22 U12.50@2205.98,3977.68 ; v1@2212.85,4010.97 U12.49@2225.66,3977.68 ; v1@2215.27,4017.63 2205.76,4007.64 ; v1@2218.17,4006.66 2177.61,4012.64 v1@2218.17,4018.63 ; v1@2219.52,4006.71 2205.76,4007.64 ; v1@2224.07,4010.15 U12.50@2205.98,3977.68 ; v1@2224.28,4010.66 U12.50@2205.98,3967.5 ; v1@2224.57,4013.33 U12.49@2225.66,3977.68 ; v1@2224.59,4013.19 U12.49@2225.66,3968.58 ; U12.49@2225.66,3950.52 v1@2225.66,4005.6 ; CON13.4@2231.76,1355.93 2231.76,1388.72 ; CON13.4@2231.76,1378.43 2231.76,1388.72 ; 2243.61,1400.57 2231.76,1388.72 ; 2468.61,3892.64 2481.57,3905.6 ; U12.36@2481.57,3923.35 2481.57,3905.6 ; U12.36@2481.57,3977.68 2481.57,4010.19 ; C16.1@2485,60.53 2518.48,42.91 ; C16.1@2490.76,70.63 2518.48,42.91 ; C16.1@2492.73,70.63 2518.48,42.91 ; U12.35@2501.25,3950.52 2501.25,4019.51 2496.07,4024.69 ; U12.35@2501.25,3977.68 2501.25,4013 ; C16.1@2503.37,77.6 2518.48,42.91 ; U1.31@2510.78,277.6 2510.78,244.98 ; U1.31@2510.78,302.2 2510.78,244.98 ; U12.33@2540.62,3950.52 2540.62,4015.14 2531.07,4024.69 ; U12.33@2540.62,3977.68 2540.62,4013 ; U1.3@2574.76,410.47 2556.23,410.47 ; C8.1@2613.5,74.95 2608.67,42.91 ; U12.29@2619.36,3950.52 2619.36,4016.4 2611.07,4024.69 ; U12.29@2619.36,3977.68 2619.36,4013 ; C8.1@2623.3,81.79 2660.76,95 ; U1.3@2623.97,410.47 2658.89,410.47 ; C8.1@2625.46,70.63 2608.67,42.91 ; C8.1@2629.39,70.63 2660.76,95 ; C8.1@2634.83,62.04 2608.67,42.91 ; C8.1@2638.7,61.97 2660.76,95 ; C60.2@2676.02,3968.8 2688.61,4012.15 ; C60.2@2688.61,3967.01 2688.61,4012.15 ; C7.1@2695.76,70.63 2731.39,70.63 ; C7.1@2697.73,70.63 2731.39,70.63 ; C7.1@2700.13,58.14 2731.39,70.63 ; C7.1@2700.13,83.12 2731.39,70.63 ; C60.2@2701.2,3968.8 2688.61,4012.15 ; C6.1@2753.48,333.95 2765.76,355 ; C6.1@2756.01,334.3 C6.1@2766.77,343.31 ; C6.1@2756.07,326.89 C6.1@2767.03,317.93 ; C6.1@2756.58,326.33 C6.1@2769.42,318.03 ; C6.1@2756.55,334.91 C6.1@2769.3,343.25 ; C6.1@2756.58,334.93 C6.1@2769.42,343.23 ; C6.1@2756.61,326.3 C6.1@2769.54,318.04 ; 2758.9,2334.28 CON11.18@2793.9,2334.28 ; 2758.9,2393.32 CON11.12@2793.9,2393.32 ; 2758.9,2452.38 CON11.6@2793.9,2452.38 ; C6.1@2760.01,336.58 C22.2@2815.76,340.62 ; C6.1@2760.11,324.67 C22.2@2815.74,321.63 ; C6.1@2760.17,336.6 2801.5,337.66 ; C6.1@2760.27,324.65 2801.55,324.29 ; C6.1@2761.15,336.62 2801.76,330.95 ; C6.1@2761.25,324.65 2801.76,330.95 ; C6.1@2762.05,336.49 C22.2@2815.74,321.63 ; C6.1@2762.11,336.48 2801.55,324.29 ; C6.1@2762.15,324.79 C22.2@2815.76,340.62 ; C6.1@2762.21,324.81 2801.5,337.66 ; C6.1@2766.28,328.27 C6.1@2769.42,343.23 ; C6.1@2766.28,332.99 C6.1@2769.42,318.03 ; C6.1@2766.26,333.04 C6.1@2769.54,318.04 ; C6.1@2766.29,328.31 C6.1@2769.3,343.25 ; C6.1@2766.58,332.09 C6.1@2767.03,317.93 ; C6.1@2766.61,329.28 C6.1@2766.77,343.31 ; C6.1@2771.68,342.72 C22.2@2815.74,321.63 ; C6.1@2771.91,318.62 C22.2@2815.76,340.62 ; C6.1@2778.04,333.95 2765.76,355 ; CON11.78@2816.4,1743.72 2866.77,1743.72 ; CON11.18@2816.4,2334.28 2741.48,2334.28 2725.76,2350 2725.76,2395 ; CON11.6@2816.4,2452.38 2738.14,2452.38 2725.76,2440 2725.76,2395 ; C22.2@2826.93,343.84 C6.1@2781.07,330.63 ; C22.2@2827.26,318.64 C6.1@2781.07,330.63 ; C22.2@2828.79,331.26 C6.1@2781.07,330.63 ; C22.2@2830.76,331.26 2830.13,330.63 C6.1@2765.76,330.63 2765.76,355 ; CON11.78@2838.9,1743.72 2866.77,1743.72 ; CON11.12@2838.9,2393.32 2873.9,2393.32 ; 2873.61,1750.57 2866.77,1743.72 ; 2877.02,2393.32 CON11.11@2912.02,2393.32 ; C52.1@2887.81,4244.81 C52.1@2879.14,4234.61 ; C52.1@2890.27,4234.11 C52.1@2903.64,4234.61 ; C52.1@2891.39,4238.03 2891.39,4214.37 ; C52.1@2892.51,4234.11 C52.1@2879.14,4234.61 ; C52.1@2894.98,4244.81 C52.1@2903.64,4234.61 ; CON11.17@2934.52,2334.28 3000.04,2334.28 3018.61,2352.85 v2(3018.61,2405.57) 3006.37,2393.32 ; CON11.17@2957.02,2334.28 2992.02,2334.28 ; CON11.11@2957.02,2393.32 2992.02,2393.32 ; U5.6@2961.39,4004.21 U5.21@2961.39,4040.63 ; U5.6@2961.39,4017.01 U5.21@2961.39,4040.63 ; C46.1@2965.76,3850.63 v1(3030.76,3850.63) ; C46.1@2966.9,3837.94 C51.1@3015.75,3841.13 ; C46.1@2966.9,3863.32 C51.1@3015.75,3860.13 ; C46.1@2971.8,3838.58 C51.1@3015.75,3860.13 ; C46.1@2971.8,3862.68 C51.1@3015.75,3841.13 ; U5.21@3000.76,4107.09 U5.18@3000.76,4142.99 ; U5.18@3000.76,4168.58 3000.76,4180 ; v2@3012.63,2405.13 3018.61,2364.57 v2@3024.6,2405.13 ; v2@3013.7,2409.01 3006.37,2393.32 ; v2@3022.06,2400.66 3006.37,2393.32 ; C51.1@3024.77,3850.32 C51.1@3027.1,3863.23 ; C51.1@3024.77,3850.94 C51.1@3027.1,3838.03 ; C51.1@3025.95,3847.04 C51.1@3036.15,3838.38 ; C51.1@3025.95,3854.21 C51.1@3036.15,3862.88 ; C51.1@3028.79,3850.63 C46.1@2981.08,3850.63 ; C51.1@3032.73,3850.63 3056.39,3850.63 ; C51.1@3035.99,3847.68 C51.1@3027.1,3838.03 ; C51.1@3035.99,3853.58 C51.1@3027.1,3863.23 ; C51.1@3036.65,3849.51 C51.1@3036.15,3862.88 ; C51.1@3036.65,3851.75 C51.1@3036.15,3838.38 ; U5.10@3040.13,4017.01 U5.21@3040.13,4040.63 ; 3062.07,3958.69 U5.10@3040.13,3991.42 ; U5.15@3063.75,4119.37 U5.21@3040.13,4119.37 ; C53.1@3097.53,4236.34 3110.13,4190.31 ; C53.1@3110.13,4238.03 3110.13,4190.31 ; C53.1@3110.13,4240 3110.13,4152.95 U5.15@3076.55,4119.37 U5.21@3040.13,4119.37 ; C53.1@3122.73,4236.34 3110.13,4190.31 ; R15.1@3128.76,216.58 3141.39,264.95 ; R29.1@3128.76,517.42 3141.39,469.05 ; C18.2@3128.79,287.34 3141.39,241.31 ; C21.2@3128.79,446.66 3141.39,492.69 ; C18.2@3132.11,297.73 3100.97,255.22 ; C18.2@3134.06,303.36 3174.39,324 ; C21.2@3134.06,430.64 3174.39,410 ; C18.2@3141.39,292.97 3174.39,324 ; C21.2@3141.39,441.03 3174.39,410 ; C21.2@3141.39,444.97 3141.39,492.69 ; R15.1@3143.36,215 3141.39,264.95 ; R29.1@3143.36,519 3141.39,469.05 ; R15.1@3145.33,215 3141.39,218.94 C18.2@3141.39,291 ; R29.1@3145.33,519 3141.39,515.06 C21.2@3141.39,443 3174.39,410 ; C18.2@3148.31,278.37 3100.97,255.22 ; C18.2@3151.32,285.02 3174.39,324 ; C21.2@3151.32,448.98 3174.39,410 ; C18.2@3153.99,287.34 3141.39,241.31 ; C21.2@3153.99,446.66 3141.39,492.69 ; R15.1@3157.79,217.73 3141.39,264.95 ; R29.1@3157.79,516.27 3141.39,469.05 ; C47.1@3247.48,3960.71 C48.1@3249.05,4009.09 ; C48.1@3247.48,4019.04 C55.1@3249.05,4067.43 ; C54.1@3247.48,4134.29 C55.1@3249.05,4085.91 ; C48.1@3247.53,4014.67 C47.1@3260.13,3968.65 ; C55.1@3247.53,4073 C48.1@3260.13,4026.98 ; C55.1@3247.53,4080.33 C54.1@3260.13,4126.35 ; C54.1@3247.53,4131.29 C55.1@3260.13,4086.67 ; C54.1@3247.53,4131.34 C55.1@3260.13,4085.31 ; C47.1@3248.24,3966.48 C48.1@3271.21,4009.09 ; C48.1@3248.24,4024.81 C55.1@3271.21,4067.43 ; C54.1@3248.24,4128.52 C55.1@3271.21,4085.91 ; C47.1@3248.85,3963.9 3235.76,3925 ; C47.1@3260.13,3958.03 3235.76,3925 ; C48.1@3260.13,4016.36 C47.1@3260.13,3968.65 ; C55.1@3260.13,4074.7 C48.1@3260.13,4026.98 ; C55.1@3260.13,4078.64 C54.1@3260.13,4126.35 ; C54.1@3260.13,4145 C55.1@3260.13,4086.67 ; C47.1@3269.07,3948.99 3235.76,3925 ; C47.1@3272.02,3966.48 C48.1@3249.05,4009.09 ; C48.1@3272.02,4024.81 C55.1@3249.05,4067.43 ; C54.1@3272.02,4128.52 C55.1@3249.05,4085.91 ; C48.1@3272.73,4014.67 C47.1@3260.13,3968.65 ; C55.1@3272.73,4073 C48.1@3260.13,4026.98 ; C55.1@3272.73,4080.33 C54.1@3260.13,4126.35 ; C54.1@3272.73,4131.29 C55.1@3260.13,4086.67 ; C54.1@3272.73,4131.34 C55.1@3260.13,4085.31 ; C47.1@3272.78,3960.71 C48.1@3271.21,4009.09 ; C48.1@3272.78,4019.04 C55.1@3271.21,4067.43 ; C54.1@3272.78,4134.29 C55.1@3271.21,4085.91 ; Q2.2@3403.63,3468.77 3450.76,3500 ; Q2.2@3408.73,3457.69 3440.98,3490.22 ; Q2.2@3408.8,3457.77 3440.7,3488.65 ; Q2.2@3409.08,3458.06 3445.22,3488.94 ; Q2.2@3412.63,3447.78 Q2.2@3425.42,3449.46 ; Q2.2@3413.26,3457.69 3450.76,3500 ; Q2.2@3416.52,3458.79 Q2.2@3425.42,3449.46 ; Q2.2@3417.95,3450 3445.22,3488.94 ; Q2.2@3418.22,3450.37 3440.7,3488.65 ; Q2.2@3418.26,3450.44 3440.98,3490.22 ; C20.2@3429.25,432.51 3375.14,405 ; C20.2@3433.79,420.63 3375.14,405 ; C20.2@3435.76,408.07 3375.14,405 ; C20.2@3435.76,420.63 3420.13,405 3179.39,405 3174.39,410 ; Q3.2@3557.05,3448.2 3527.36,3494.65 ; Q3.2@3568.26,3453.75 3522.01,3500 3450.76,3500 ; Q3.2@3568.26,3457.69 3527.36,3494.65 ; Q3.2@3576.57,3469.8 3527.36,3494.65 ; J2.8@144.09,1217.95 161.39,1199.74 ; J2.8@144.09,1217.95 161.39,1199.74 ; J2.8@144.09,1217.95 161.39,1199.74 ; J2.8@144.09,1217.95 161.39,1199.74 ; 150.53,1169.9 J2.8@161.39,1224.86 ; 151.41,4257.78 R5.1@197.83,4230.03 ; 151.41,4257.78 151.41,4308.97 ; 152.1,4257.37 v4(185.76,4215) ; J2.8@152.9,1223.38 161.39,1199.74 ; J2.8@152.9,1223.38 161.39,1199.74 ; J2.8@152.9,1223.38 161.39,1199.74 ; J2.8@152.9,1223.38 161.39,1199.74 ; 153.21,4254.38 v4(185.76,4215) ; 154.97,4254.23 v4(185.76,4215) ; 154.97,4254.23 192.97,4221.93 155.04,4253.96 ; 154.97,4254.23 177.31,4209.64 155.04,4253.96 ; 155.04,4253.96 v4(185.76,4215) ; 156.7,1170.84 J2.8@161.39,1224.86 ; J2.6@161.39,1146.12 186.51,1146.12 ; J2.6@161.39,1146.12 216.35,1156.98 ; J2.6@161.39,1146.12 186.51,1146.12 ; J2.6@161.39,1146.12 215.4,1150.81 ; J2.6@161.39,1146.12 186.51,1146.12 ; J2.6@161.39,1146.12 215.4,1141.43 ; J2.6@161.39,1146.12 186.51,1146.12 ; J2.6@161.39,1146.12 216.35,1135.26 ; J2.6@161.39,1146.12 J2.8@161.39,1224.86 ; J2.6@161.39,1146.12 J2.5@240.13,1146.12 374.64,1146.12 420.76,1100 C89.1@420.76,494.37 332.39,406 332.39,166.6 ; 161.39,1199.74 J2.8@161.39,1224.86 ; 161.39,1199.74 J2.8@169.88,1223.38 ; 161.39,1199.74 J2.8@178.69,1217.95 ; 161.39,1199.74 J2.8@161.39,1224.86 ; 161.39,1199.74 J2.8@169.88,1223.38 ; 161.39,1199.74 J2.8@178.69,1217.95 ; 161.39,1199.74 J2.8@161.39,1224.86 ; 161.39,1199.74 J2.8@169.88,1223.38 ; 161.39,1199.74 J2.8@178.69,1217.95 ; 161.39,1199.74 J2.8@161.39,1224.86 ; 161.39,1199.74 J2.8@169.88,1223.38 ; 161.39,1199.74 J2.8@178.69,1217.95 ; J2.8@161.39,1224.86 166.08,1170.84 ; J2.8@161.39,1224.86 172.25,1169.9 ; J2.8@161.39,1224.86 J2.7@240.13,1224.86 ; J2.6@162.87,1137.62 186.51,1146.12 ; J2.6@162.87,1137.62 186.51,1146.12 ; J2.6@162.87,1137.62 186.51,1146.12 ; J2.6@162.87,1137.62 186.51,1146.12 ; J2.6@162.87,1154.61 186.51,1146.12 ; J2.6@162.87,1154.61 186.51,1146.12 ; J2.6@162.87,1154.61 186.51,1146.12 ; J2.6@162.87,1154.61 186.51,1146.12 ; J2.6@168.29,1128.82 186.51,1146.12 ; J2.6@168.29,1128.82 186.51,1146.12 ; J2.6@168.29,1128.82 186.51,1146.12 ; J2.6@168.29,1128.82 186.51,1146.12 ; J2.6@168.29,1163.41 186.51,1146.12 ; J2.6@168.29,1163.41 186.51,1146.12 ; J2.6@168.29,1163.41 186.51,1146.12 ; J2.6@168.29,1163.41 186.51,1146.12 ; 185.17,1214 J2.7@240.13,1224.86 ; 185.17,1235.72 J2.7@240.13,1224.86 ; v4(185.76,4215) R5.1@197.83,4230.03 ; 186.12,1220.17 J2.7@240.13,1224.86 ; 186.12,1229.55 J2.7@240.13,1224.86 ; 215.01,1224.86 J2.7@240.13,1224.86 ; 215.01,1224.86 J2.7@238.65,1233.35 ; 215.01,1224.86 J2.7@238.65,1216.36 ; 215.01,1224.86 J2.7@233.23,1242.15 ; 215.01,1224.86 J2.7@233.23,1207.56 ; 215.01,1224.86 J2.7@240.13,1224.86 ; 215.01,1224.86 J2.7@238.65,1233.35 ; 215.01,1224.86 J2.7@238.65,1216.36 ; 215.01,1224.86 J2.7@233.23,1242.15 ; 215.01,1224.86 J2.7@233.23,1207.56 ; 215.01,1224.86 J2.7@240.13,1224.86 ; 215.01,1224.86 J2.7@238.65,1233.35 ; 215.01,1224.86 J2.7@238.65,1216.36 ; 215.01,1224.86 J2.7@233.23,1242.15 ; 215.01,1224.86 J2.7@233.23,1207.56 ; 215.01,1224.86 J2.7@240.13,1224.86 ; 215.01,1224.86 J2.7@238.65,1233.35 ; 215.01,1224.86 J2.7@238.65,1216.36 ; 215.01,1224.86 J2.7@233.23,1242.15 ; 215.01,1224.86 J2.7@233.23,1207.56 ; J7.7@280.25,114.45 352.97,132.83 ; J7.7@280.25,114.45 332.39,166.6 ; J7.7@280.25,114.45 J7.7@298.63,132.83 ; J7.7@298.63,132.83 332.39,166.6 ; J7.7@298.63,132.83 495.76,132.83 ; 452.39,2491.63 452.39,2643.83 458.57,2650 574.18,2650 732.43,2491.75 CON10.79@800.66,2491.75 CON10.80@918.77,2491.75 959.79,2491.75 ; R128.1@472.95,2129.94 482.08,2179.5 C88.2@477.26,2229.15 ; R129.1@486.02,2179.5 C88.2@487.06,2229.18 ; R129.1@486.02,2179.5 C88.2@497.2,2228.87 ; R129.1@486.02,2179.5 R128.1@495.15,2129.94 ; 495.76,132.83 572.89,132.83 J7.6@591.27,114.45 ; 520.82,132.83 J7.6@591.27,114.45 ; J7.6@591.27,114.45 591.27,175.51 ; 651.41,4015.65 R135.2@688.65,4032.85 ; 651.41,4015.65 668.61,4032.85 ; 668.61,4032.85 R135.2@688.65,4032.85 ; 668.61,4032.85 683.27,4046.52 668.61,4032.85 ; 668.61,4032.85 683.27,4019.19 668.61,4032.85 ; 668.61,4032.85 R135.2@688.65,4032.85 ; 702.16,239.38 Y1.4@729.22,212.32 ; 702.16,239.38 702.16,340.14 716.77,354.74 770.5,354.74 ; 702.16,239.38 Y1.4@729.22,212.32 ; Y1.4@729.22,212.32 761.54,180 ; 761.54,180 875.76,180 ; 770.5,354.74 Y1.2@802.3,327.68 ; 770.5,354.74 797.57,327.68 Y1.2@802.3,327.68 ; C27.2@800.64,521.06 C31.2@826.39,452.84 ; C27.2@800.64,521.06 C31.2@837.52,458.99 ; C27.2@800.64,521.06 C31.2@813.79,453.68 ; C27.2@800.64,521.06 C31.2@826.39,452.57 ; C27.2@800.64,528.94 C26.2@826.39,595.2 ; C27.2@800.64,528.94 C26.2@821.39,598.03 ; C27.2@800.64,528.94 C26.2@809.02,595.06 ; C27.2@800.64,528.94 C26.2@833.43,593.49 ; Y1.2@802.3,327.68 826.39,356.5 ; Y1.2@802.3,327.68 802.3,332.41 826.39,356.5 ; Y1.2@802.3,327.68 854.85,327.68 ; C26.2@809.02,595.06 C27.2@826.39,549.97 ; C32.2@809.02,660.08 v1(821.39,665) ; C32.2@809.02,660.08 C26.2@826.39,614.7 ; 810.17,624.19 v1(821.39,665) ; C32.2@811.97,652.37 v1(821.39,665) ; C32.2@811.97,652.37 C32.2@815.98,667.61 ; C32.2@811.97,652.37 C32.2@825.43,660.56 ; C32.2@811.97,652.37 v1(821.39,665) ; C32.2@811.97,652.37 C32.2@815.98,667.61 ; C32.2@811.97,652.37 C32.2@825.43,660.56 ; C32.2@811.97,652.37 v1(821.39,665) ; C32.2@811.97,652.37 C32.2@815.98,667.61 ; C32.2@811.97,652.37 C32.2@825.43,660.56 ; C32.2@811.97,652.37 C26.2@821.39,601.97 ; C26.2@813.03,615.33 v1(821.39,665) ; C31.2@813.79,453.68 C27.2@826.39,499.25 ; 814.14,622.32 v1(821.39,665) ; C32.2@815.4,664.71 C26.2@821.39,601.97 ; C32.2@815.4,664.71 C26.2@821.39,601.97 ; C32.2@815.4,664.71 C26.2@821.39,601.97 ; C32.2@815.68,663.16 C32.2@822.58,651.56 ; C32.2@815.68,663.16 C32.2@822.58,651.56 ; C32.2@815.68,663.16 C32.2@822.58,651.56 ; C32.2@816.16,662.06 C32.2@826.39,649.97 ; C32.2@816.16,662.06 C32.2@826.39,649.97 ; C32.2@816.16,662.06 C32.2@826.39,649.97 ; C26.2@821.39,598.03 C27.2@826.39,549.97 ; C26.2@821.39,601.97 v1(821.39,665) ; C26.2@821.39,601.97 C32.2@827.38,664.71 ; C26.2@821.39,601.97 v1(821.39,665) ; C26.2@821.39,601.97 C32.2@827.38,664.71 ; C26.2@821.39,601.97 v1(821.39,665) ; C26.2@821.39,601.97 C32.2@827.38,664.71 ; C26.2@821.39,601.97 C32.2@826.39,649.97 ; C26.2@821.39,601.97 C32.2@822.58,651.56 ; C26.2@821.39,601.97 C32.2@831.96,649.34 ; v1(821.39,665) C32.2@826.39,649.97 ; v1(821.39,665) C32.2@826.39,649.97 ; v1(821.39,665) 830.5,624.61 ; v1(821.39,665) C32.2@826.39,649.97 ; v1(821.39,665) C32.2@822.58,651.56 ; v1(821.39,665) C32.2@822.58,651.56 ; v1(821.39,665) 829.06,624.27 ; v1(821.39,665) C32.2@822.58,651.56 ; v1(821.39,665) 826.39,622.44 ; v1(821.39,665) C26.2@831.11,611.02 ; v1(821.39,665) 825.41,624.14 ; v1(821.39,665) C26.2@826.39,614.7 ; v1(821.39,665) C26.2@826.39,614.7 ; v1(821.39,665) C32.2@834.1,662.67 ; C32.2@822.58,651.56 C32.2@827.33,664.19 ; C32.2@822.58,651.56 C32.2@827.33,664.19 ; C32.2@822.58,651.56 C32.2@827.33,664.19 ; CON10.39@823.16,2098.06 831.13,2098.06 ; CON10.39@823.16,2098.06 843.61,2085.57 831.13,2098.06 ; CON10.39@823.16,2098.06 831.13,2098.06 ; 826.39,356.5 C31.2@826.39,450 C27.2@826.39,499.25 ; C31.2@826.39,452.57 794.67,518.51 C31.2@826.39,452.84 ; C31.2@826.39,452.57 806.82,523.08 C31.2@826.39,452.84 ; C31.2@826.39,452.57 785.95,513.56 C31.2@826.39,452.84 ; C31.2@826.39,452.57 816.64,525.09 C31.2@826.39,452.84 ; C31.2@826.39,452.57 826.72,525.74 C31.2@826.39,452.84 ; C26.2@826.39,614.7 815.47,664.05 C26.2@826.39,614.7 ; C26.2@826.39,614.7 827.39,665.24 C26.2@826.39,614.7 ; C26.2@826.39,614.7 C32.2@834.1,662.67 ; C32.2@826.39,649.97 C32.2@827.34,665.78 ; C32.2@826.39,649.97 C32.2@827.34,665.78 ; C32.2@826.39,649.97 C32.2@827.34,665.78 ; R44.1@834.09,875.14 v3(850.76,870) ; R44.1@834.09,875.14 848.61,922.66 ; 848.61,914.11 v3(850.76,870) ; 848.61,914.11 859.66,871.35 848.61,914.15 ; 848.61,914.11 841.77,870.48 848.61,914.15 ; 848.61,914.15 v3(850.76,870) ; 848.61,922.66 v3(850.76,870) ; 849.78,918.84 v3(850.76,870) ; v3(850.76,870) 885.15,834.26 ; v3(850.76,870) 887.23,831.35 ; v3(850.76,870) 887.54,833.33 ; v3(850.76,870) 885.27,834.35 ; 854.85,327.68 C37.2@876.03,371.37 ; 854.85,327.68 C37.2@895.08,354.86 ; 856.8,331.69 v1(888.61,367.15) ; 857.93,329.76 v1(888.61,367.15) ; 859.77,332.59 v1(888.61,367.15) ; 859.74,333.32 v1(888.61,367.15) ; C36.2@874.04,144.53 v1(888.61,141.2) ; C36.2@874.04,144.53 875.76,180 ; 875.76,180 v1(888.61,141.2) ; 875.76,180 C36.2@894.16,143.5 ; 875.76,180 C36.2@882.8,139.74 ; 875.76,180 v1(888.61,141.2) ; 875.76,180 C36.2@894.16,143.5 ; 875.76,180 C36.2@882.8,139.74 ; 875.76,180 v1(888.61,141.2) ; 875.76,180 C36.2@894.16,143.5 ; 875.76,180 C36.2@882.8,139.74 ; 875.76,180 C36.2@897.86,152.2 ; 875.76,180 888.61,167.15 ; C37.2@876.03,371.37 v1(888.61,367.15) ; C36.2@876.5,150.06 v1(888.61,141.2) ; C36.2@876.5,150.06 891.12,146.65 C36.2@876.5,150.06 ; C36.2@876.5,150.06 884.18,137.16 C36.2@876.5,150.06 ; C36.2@876.5,150.06 v1(888.61,141.2) ; C36.2@876.5,150.06 888.61,167.15 ; C36.2@876.5,150.06 888.61,167.15 ; C36.2@882.65,141.89 888.61,167.15 ; C36.2@882.65,141.89 888.61,167.15 ; C36.2@882.65,141.89 888.61,167.15 ; C36.2@882.65,141.89 888.61,167.15 ; C36.2@882.65,141.89 888.61,167.15 ; C36.2@882.65,141.89 888.61,167.15 ; 885.15,834.26 857.78,875.63 885.27,834.35 ; C36.2@888.03,147.17 908.93,146.2 ; C36.2@888.03,147.17 908.93,146.2 ; C36.2@888.03,147.17 908.93,146.2 ; C36.2@888.03,147.17 908.93,146.2 ; C36.2@888.03,147.17 908.93,146.2 ; C36.2@888.03,147.17 908.93,146.2 ; C36.2@888.33,147.19 930.39,146.2 ; C36.2@888.33,147.19 930.42,146.2 ; C36.2@888.33,147.19 930.42,146.2 ; v1(888.61,141.2) 930.39,146.2 ; v1(888.61,141.2) 908.93,146.2 ; v1(888.61,141.2) 908.93,146.2 ; v1(888.61,141.2) 930.42,146.2 ; v1(888.61,141.2) 932.2,144.53 ; v1(888.61,141.2) 908.93,146.2 ; v1(888.61,141.2) 908.93,146.2 ; v1(888.61,141.2) 929.3,152.77 ; v1(888.61,141.2) 931.93,151.23 ; v1(888.61,141.2) 908.93,146.2 ; v1(888.61,141.2) 908.93,146.2 ; v1(888.61,141.2) 930.69,139.39 ; v1(888.61,141.2) 931.74,137.35 ; v1(888.61,141.2) 930.42,146.2 ; v1(888.61,141.2) 932.2,144.53 ; v1(888.61,141.2) C36.2@897.86,152.2 ; v1(888.61,141.2) 888.61,167.15 ; v1(888.61,141.2) 888.61,167.15 ; v1(888.61,141.2) C36.2@900.73,150.06 ; v1(888.61,141.2) 888.61,167.15 ; v1(888.61,141.2) 888.61,167.15 ; v1(888.61,141.2) C36.2@900.73,150.06 ; v1(888.61,141.2) 888.61,167.15 ; v1(888.61,141.2) 888.61,167.15 ; v1(888.61,141.2) C36.2@888.61,146.2 ; C36.2@888.61,146.2 888.61,167.15 ; C36.2@888.61,146.2 888.61,167.15 ; C36.2@888.61,146.2 C29.1@958.61,146.2 R33.2@1008.25,146.2 ; 888.61,167.15 C36.2@894.57,141.89 ; 888.61,167.15 C36.2@894.57,141.89 ; 888.61,167.15 C36.2@894.57,141.89 ; 888.61,167.15 C36.2@894.57,141.89 ; 888.61,167.15 C36.2@894.57,141.89 ; 888.61,167.15 C36.2@894.57,141.89 ; 888.61,167.15 C36.2@900.73,150.06 ; 888.61,167.15 C36.2@900.73,150.06 ; v1(888.61,367.15) C37.2@895.08,354.86 ; C36.2@889.75,135.31 930.39,146.2 ; C36.2@889.75,135.31 930.42,146.2 ; C36.2@889.75,135.31 930.42,146.2 ; C36.2@890.58,146.2 908.93,146.2 ; C36.2@890.58,146.2 938.3,146.2 ; C36.2@890.58,146.2 908.93,146.2 ; C36.2@890.58,146.2 938.84,154.39 ; C36.2@890.58,146.2 908.93,146.2 ; C36.2@890.58,146.2 938.84,138.01 ; C36.2@890.58,146.2 938.3,146.2 ; C36.2@890.87,135.64 908.93,146.2 ; C36.2@890.87,135.64 908.93,146.2 ; C36.2@890.87,135.64 908.93,146.2 ; C36.2@890.87,135.64 908.93,146.2 ; C36.2@890.87,135.64 908.93,146.2 ; C36.2@890.87,135.64 908.93,146.2 ; C36.2@894.99,134.27 908.93,146.2 ; C36.2@894.99,134.27 908.93,146.2 ; C36.2@894.99,134.27 908.93,146.2 ; C36.2@894.99,158.13 908.93,146.2 ; C36.2@894.99,158.13 908.93,146.2 ; C36.2@894.99,158.13 908.93,146.2 ; C36.2@900.73,150.06 893.05,137.16 C36.2@900.73,150.06 ; C36.2@900.73,150.06 886.11,146.65 C36.2@900.73,150.06 ; 932.2,144.53 889.48,135.26 932.2,144.53 ; 932.2,144.53 888.57,147.2 932.2,144.53 ; 938.3,146.2 892.28,133.6 938.3,146.2 ; 938.3,146.2 892.28,158.8 938.3,146.2 ; C29.1@960.58,146.2 R33.2@1008.28,148.02 ; C29.1@960.58,146.2 R33.2@1006.89,161.71 ; C29.1@960.58,146.2 R33.2@1007.48,134.39 ; C29.1@960.58,146.2 R33.2@1008.25,146.2 ; C29.1@962.31,146.2 1012.19,148.17 C38.2@1062.03,146.2 ; R33.2@1016.07,146.2 C38.2@1063.79,145.63 ; R33.2@1016.11,148.01 C38.2@1063.79,145.63 ; R33.2@1016.79,134.36 C38.2@1063.79,145.63 ; R33.2@1017.6,161.67 C38.2@1063.79,145.63 ; 1051.88,368.84 1076.88,368.84 ; 1076.88,368.84 1066.88,378.84 U8.48@1066.88,402.3 1100.35,402.3 ; C35.1@1092.23,870.43 1133.2,873.69 ; C35.1@1092.19,870.43 R45.2@1141.86,873.41 ; C35.1@1092.19,870.43 R45.2@1141.86,873.41 ; v1(1092.19,876.43) 1133.2,873.69 ; v1(1092.19,876.43) C35.1@1095.45,862.29 ; v1(1092.19,876.43) R45.2@1141.86,873.41 ; v1(1092.19,876.43) C35.1@1096.25,887.48 ; v1(1092.19,876.43) R45.2@1141.86,873.41 ; v1(1092.19,876.43) 1132.94,883.15 ; v1(1092.19,876.43) C35.1@1098.4,862.95 ; v1(1092.19,876.43) R45.2@1141.54,884.97 ; v1(1092.19,876.43) C35.1@1093.18,887.62 ; v1(1092.19,876.43) R45.2@1141.54,884.97 ; v1(1092.19,876.43) 1131.9,864.33 ; v1(1092.19,876.43) C35.1@1092.33,862.36 ; v1(1092.19,876.43) 1133.15,861.81 ; v1(1092.19,876.43) R45.2@1139.16,862.95 ; v1(1092.19,876.43) 1133.26,874.94 ; v1(1092.19,876.43) C35.1@1095.85,862.34 ; v1(1092.19,876.43) R45.2@1141.87,874.94 ; v1(1092.19,876.43) C35.1@1095.85,887.54 ; v1(1092.19,876.43) R45.2@1141.87,874.94 ; v1(1092.19,876.43) 1133.14,873.76 ; v1(1092.19,876.43) R45.2@1134.4,883.1 ; v1(1092.19,876.43) 1132.28,864.82 ; v1(1092.19,876.43) 1133.25,874.94 ; v1(1092.19,876.43) C35.1@1092.19,874.94 1149.14,874.94 R45.2@1153.08,871 1189.08,835 ; C35.1@1092.33,862.36 R45.2@1141.26,861.7 ; C35.1@1093.18,887.62 R45.2@1141.54,884.97 ; C35.1@1093.56,870.59 R45.2@1141.54,884.97 ; C35.1@1093.56,870.59 R45.2@1141.54,884.97 ; C35.1@1093.54,870.58 R45.2@1134.4,883.1 ; C35.1@1094.16,874.94 R45.2@1141.86,873.41 ; C35.1@1094.16,874.94 R45.2@1141.54,884.97 ; C35.1@1094.16,874.94 R45.2@1141.26,861.7 ; C35.1@1094.16,874.94 R45.2@1141.87,874.94 ; C35.1@1095.45,862.29 R45.2@1141.86,873.41 ; C35.1@1095.85,862.34 R45.2@1141.87,874.94 ; C35.1@1095.85,887.54 R45.2@1141.87,874.94 ; C35.1@1096.25,887.48 R45.2@1141.86,873.41 ; C35.1@1098.4,862.95 R45.2@1141.54,884.97 ; 1100.35,402.3 v2(1133.61,435.57) ; 1100.35,402.3 U8.49@1129.11,439.53 ; 1100.35,402.3 U8.49@1137.58,431.07 ; 1100.35,402.3 v2(1133.61,435.57) ; 1100.35,402.3 U8.49@1129.11,439.53 ; 1100.35,402.3 U8.49@1137.58,431.07 ; 1100.35,402.3 v2(1133.61,435.57) ; 1100.35,402.3 U8.49@1129.11,439.53 ; 1100.35,402.3 U8.49@1137.58,431.07 ; 1100.35,402.3 v2(1133.61,435.57) ; 1100.35,402.3 U8.49@1129.11,439.53 ; 1100.35,402.3 U8.49@1137.58,431.07 ; 1100.35,402.3 v2(1133.61,435.57) ; 1100.35,402.3 U8.49@1129.11,439.53 ; 1100.35,402.3 U8.49@1137.58,431.07 ; 1100.35,402.3 v2(1133.61,435.57) ; 1100.35,402.3 U8.49@1129.11,439.53 ; 1100.35,402.3 U8.49@1137.58,431.07 ; 1100.35,402.3 v7(1208.61,510.57) ; 1100.35,402.3 v2(1133.61,435.57) ; 1100.79,402.89 v2(1133.61,435.57) ; 1100.79,402.89 U8.49@1129.11,439.54 ; 1100.79,402.89 U8.49@1137.56,431.05 ; 1100.93,402.75 v2(1133.61,435.57) ; 1100.93,402.75 U8.49@1129.1,439.52 ; 1100.93,402.75 U8.49@1137.58,431.07 ; 1101.2,403.27 v2(1133.61,435.57) ; 1101.2,403.27 U8.49@1129.11,439.53 ; 1101.2,403.27 U8.49@1137.56,431.05 ; 1101.32,403.16 v2(1133.61,435.57) ; 1101.32,403.16 U8.49@1129.1,439.52 ; 1101.32,403.16 U8.49@1137.58,431.07 ; 1101.4,403.36 v2(1133.61,435.57) ; 1101.4,403.36 U8.49@1129.1,439.53 ; 1101.4,403.36 U8.49@1137.57,431.06 ; 1101.4,403.36 v2(1133.61,435.57) ; 1101.4,403.36 U8.49@1129.1,439.53 ; 1101.4,403.36 U8.49@1137.57,431.06 ; U8.49@1120.03,599.15 v2(1133.61,580.57) U8.49@1168.17,551.01 ; U8.49@1120.03,599.15 v7(1208.61,510.57) ; U8.49@1129.1,439.52 U8.49@1160.67,471.07 ; 1132.94,883.15 1091.64,882.4 R45.2@1134.4,883.1 ; 1133.14,873.76 1093.01,882.37 1133.2,873.69 ; 1133.26,874.94 1092.41,870.43 1133.25,874.94 ; 1133.26,874.94 1092.84,882.39 1133.25,874.94 ; v2(1133.61,435.57) U8.49@1160.67,471.07 ; v2(1133.61,435.57) U8.49@1169.11,462.62 ; v2(1133.61,435.57) U8.49@1155.82,474.57 ; v2(1133.61,435.57) U8.49@1172.61,457.78